# EAGLE board breakout1_ready_for_layout (EAGLE 6.6.0), part 1 of 2
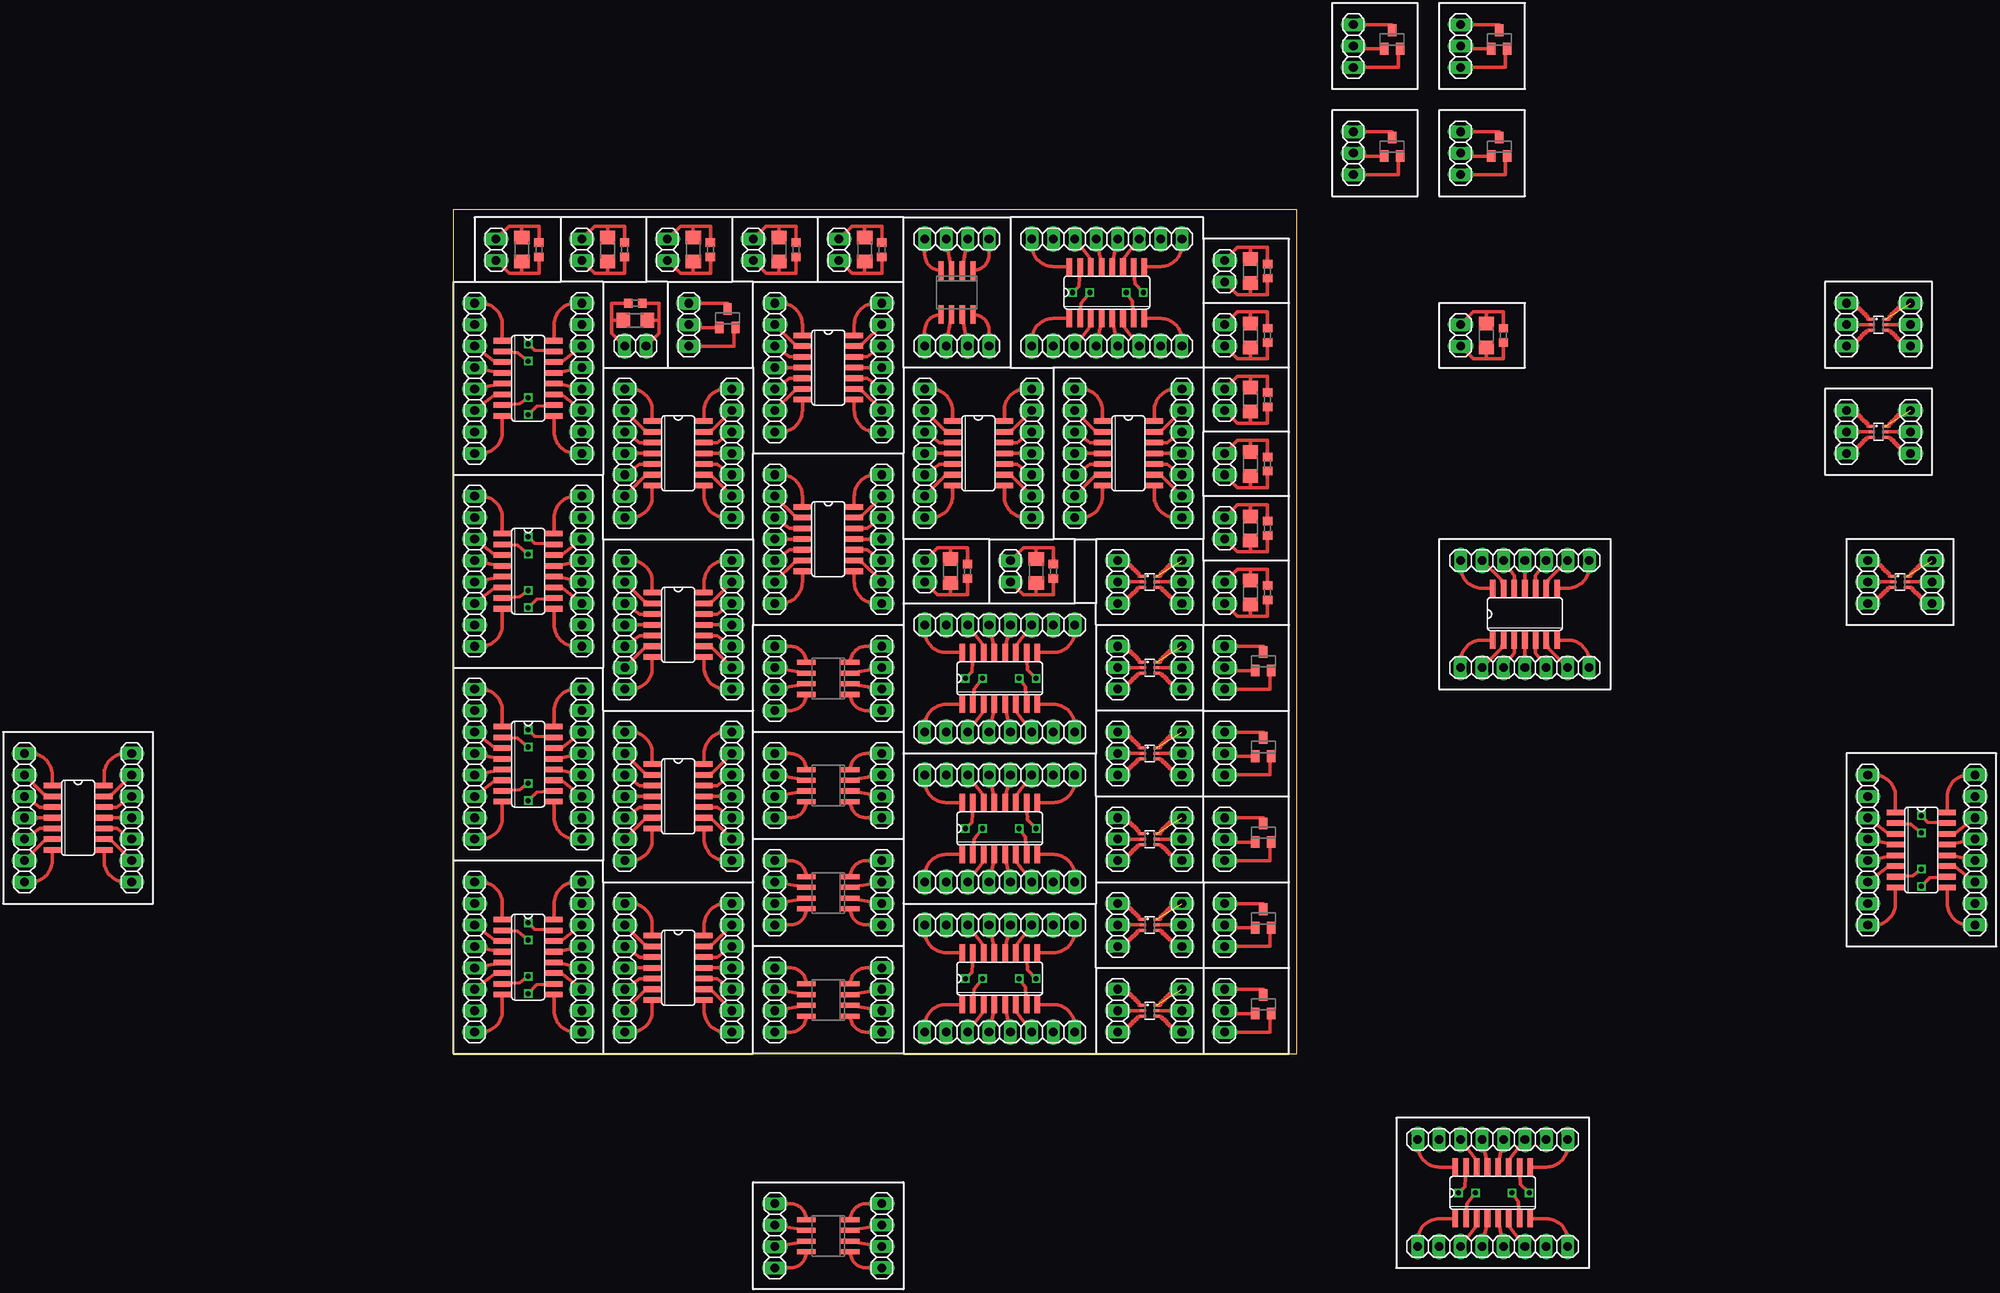
[diagram p0: board, top side]
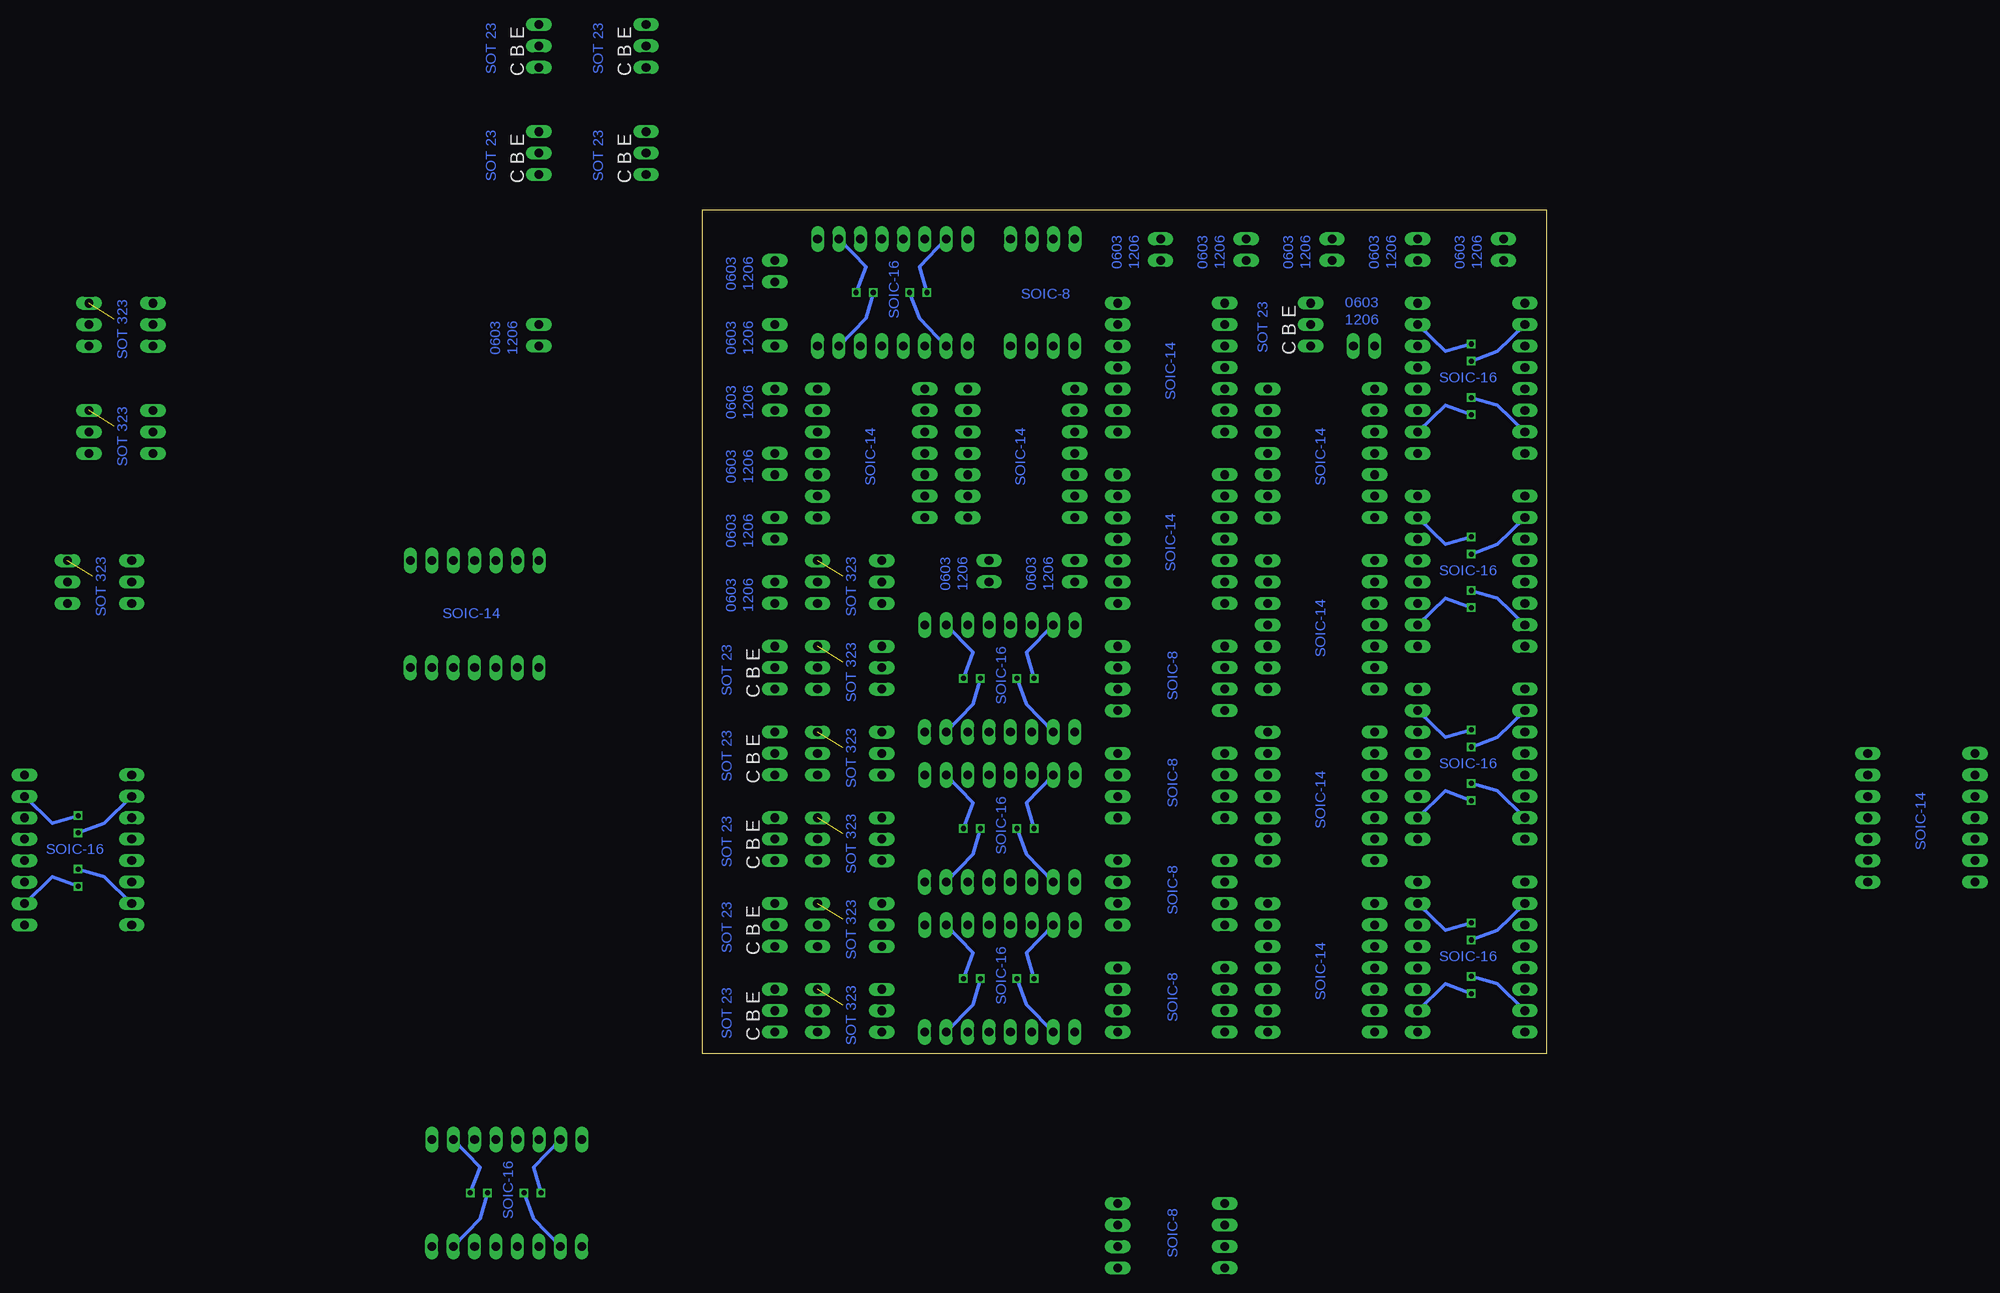
[diagram p1: board, bottom side, seen from below]

Size 100 x 100 mm. Coordinates in mm from the lower left corner, seen from the top.
Outline: 0,0 100,0 100,100 0,100 0,0
Copper layers (1*16): Top 0.035mm / dielectric 1.5mm / Bottom 0.035mm
Design rules "default": minimum track width 10mil, minimum drill 24mil, track to track 8mil, track to pad 8mil, pad to pad 8mil, via to via 8mil, smd to smd 8mil, copper to edge 40mil, drill to drill 8mil, minimum pad ring 10mil, minimum via ring 8mil, stop-mask expansion 4mil, vias tented up to drill 0mil, thermal gap 10mil

## Footprints (pad centres in the part's own frame; a part is rotated, then mirrored left to right if it is on the bottom)
SO16 = smd 0.66 x 2.032: 1 -4.445,-3.073; 2 -3.175,-3.073; 3 -1.905,-3.073; 4 -0.635,-3.073; 5 0.635,-3.073; 6 1.905,-3.073; 7 3.175,-3.073; 8 4.445,-3.073; 9 4.445,3.073; 10 3.175,3.073; 11 1.905,3.073; 12 0.635,3.073; 13 -0.635,3.073; 14 -1.905,3.073; 15 -3.175,3.073; 16 -4.445,3.073
SO14 = smd 0.66 x 2.032: 1 -3.81,-3.073; 2 -2.54,-3.073; 3 -1.27,-3.073; 4 0,-3.073; 5 1.27,-3.073; 6 2.54,-3.073; 7 3.81,-3.073; 8 3.81,3.073; 9 2.54,3.073; 10 1.27,3.073; 11 0,3.073; 12 -1.27,3.073; 13 -2.54,3.073; 14 -3.81,3.073
SO08 = smd 0.6 x 2.2: 1 -1.905,-2.6; 2 -0.635,-2.6; 3 0.635,-2.6; 4 1.905,-2.6; 5 1.905,2.6; 6 0.635,2.6; 7 -0.635,2.6; 8 -1.905,2.6
1X03 = drill 1.016 long: 1 -2.54,0; 2 0,0; 3 2.54,0
1X02 = drill 1.016 long: 1 -1.27,0; 2 1.27,0
1X08 = drill 1.016 long: 1 -8.89,0; 2 -6.35,0; 3 -3.81,0; 4 -1.27,0; 5 1.27,0; 6 3.81,0; 7 6.35,0; 8 8.89,0
1X07 = drill 1.016 long: 1 -7.62,0; 2 -5.08,0; 3 -2.54,0; 4 0,0; 5 2.54,0; 6 5.08,0; 7 7.62,0
1X04 = drill 1.016 long: 1 -3.81,0; 2 -1.27,0; 3 1.27,0; 4 3.81,0
SOT23 = smd 1 x 1.4: 1 -0.95,-1.1; 2 0.95,-1.1; 3 0,1.1
R0603 = smd 1 x 1.1: 1 -0.85,0; 2 0.85,0
R1206 = smd 1.6 x 1.803: 1 -1.422,0; 2 1.422,0
SOT363 = smd 0.3 x 0.7: 1 -0.65,-0.8; 2 0,-0.8; 3 0.65,-0.8; 4 0.65,0.8; 5 0,0.8; 6 -0.65,0.8

## Placement (x,y rotation side)
IC1  74LS151D  [SO16]  8.89,34.29 270 top
IC2  74LS03D  [SO14]  127,52.07 0 top  (outside the outline)
IC3  NE555D  [SO08]  44.45,6.35 90 top
IC4  74LS151D  [SO16]  8.89,11.43 270 top
IC5  74LS151D  [SO16]  8.89,57.15 270 top
IC6  74LS151D  [SO16]  173.99,24.13 270 top  (outside the outline)
IC7  74LS03D  [SO14]  26.67,10.16 270 top
IC8  74LS03D  [SO14]  26.67,30.48 270 top
IC9  74LS03D  [SO14]  -44.45,27.94 270 top  (outside the outline)
IC10  NE555D  [SO08]  44.45,19.05 90 top
IC11  NE555D  [SO08]  44.45,-21.59 90 top  (outside the outline)
IC12  74LS151D  [SO16]  123.19,-16.51 0 top  (outside the outline)
IC13  74LS151D  [SO16]  8.89,80.01 270 top
IC14  74LS03D  [SO14]  26.67,50.8 270 top
IC15  74LS03D  [SO14]  26.67,71.12 270 top
IC16  74LS03D  [SO14]  44.45,81.28 270 top
IC17  NE555D  [SO08]  44.45,31.75 90 top
IC18  NE555D  [SO08]  44.45,44.45 90 top
IC19  74LS03D  [SO14]  44.45,60.96 270 top
IC21  74LS151D  [SO16]  64.77,8.89 0 top
IC22  74LS151D  [SO16]  64.77,26.67 0 top
IC23  74LS151D  [SO16]  64.77,44.45 0 top
IC24  74LS03D  [SO14]  62.23,71.12 270 top
IC25  74LS03D  [SO14]  80.01,71.12 270 top
IC26  74LS151D  [SO16]  77.47,90.17 0 top
IC27  NE555D  [SO08]  59.69,90.17 180 top
JP1  [1X03]  78.74,5.08 90 top
JP2  [1X03]  86.36,5.08 90 top
JP3  [1X03]  106.68,106.68 270 top  (outside the outline)
JP4  [1X02]  119.38,85.09 270 top  (outside the outline)
JP5  [1X08]  15.24,34.29 90 top
JP6  [1X08]  2.54,34.29 270 top
JP7  [1X07]  127,45.72 0 top  (outside the outline)
JP8  [1X07]  127,58.42 180 top  (outside the outline)
JP9  [1X04]  50.8,6.35 90 top
JP10  [1X04]  38.1,6.35 270 top
JP11  [1X08]  15.24,11.43 90 top
JP12  [1X08]  2.54,11.43 270 top
JP13  [1X08]  15.24,57.15 90 top
JP14  [1X08]  2.54,57.15 270 top
JP15  [1X08]  180.34,24.13 90 top  (outside the outline)
JP16  [1X08]  167.64,24.13 270 top  (outside the outline)
JP17  [1X07]  20.32,10.16 270 top
JP18  [1X07]  33.02,10.16 90 top
JP19  [1X07]  20.32,30.48 270 top
JP20  [1X07]  33.02,30.48 90 top
JP21  [1X07]  -50.8,27.94 270 top  (outside the outline)
JP22  [1X07]  -38.1,27.94 90 top  (outside the outline)
JP23  [1X02]  91.44,92.71 270 top
JP24  [1X02]  91.44,85.09 270 top
JP25  [1X02]  5.08,95.25 270 top
JP26  [1X03]  106.68,119.38 270 top  (outside the outline)
JP27  [1X03]  119.38,106.68 270 top  (outside the outline)
JP28  [1X03]  119.38,119.38 270 top  (outside the outline)
JP29  [1X03]  165.1,73.66 90 top  (outside the outline)
JP30  [1X03]  172.72,73.66 90 top  (outside the outline)
JP31  [1X03]  78.74,15.24 90 top
JP32  [1X03]  86.36,15.24 90 top
JP33  [1X03]  165.1,86.36 90 top  (outside the outline)
JP34  [1X03]  172.72,86.36 90 top  (outside the outline)
JP35  [1X04]  50.8,19.05 90 top
JP36  [1X04]  38.1,19.05 270 top
JP37  [1X04]  50.8,-21.59 90 top  (outside the outline)
JP38  [1X04]  38.1,-21.59 270 top  (outside the outline)
JP39  [1X08]  123.19,-10.16 180 top  (outside the outline)
JP40  [1X08]  123.19,-22.86 0 top  (outside the outline)
JP41  [1X08]  15.24,80.01 90 top
JP42  [1X08]  2.54,80.01 270 top
JP43  [1X07]  20.32,50.8 270 top
JP44  [1X07]  33.02,50.8 90 top
JP45  [1X07]  20.32,71.12 270 top
JP46  [1X07]  33.02,71.12 90 top
JP47  [1X07]  38.1,81.28 270 top
JP48  [1X07]  50.8,81.28 90 top
JP49  [1X03]  91.44,5.08 270 top
JP50  [1X03]  91.44,15.24 270 top
JP51  [1X03]  91.44,25.4 270 top
JP52  [1X03]  91.44,35.56 270 top
JP53  [1X03]  91.44,45.72 270 top
JP54  [1X02]  91.44,62.23 270 top
JP55  [1X02]  91.44,77.47 270 top
JP56  [1X02]  91.44,69.85 270 top
JP57  [1X04]  50.8,31.75 90 top
JP58  [1X04]  38.1,31.75 270 top
JP59  [1X04]  50.8,44.45 90 top
JP60  [1X04]  38.1,44.45 270 top
JP61  [1X07]  38.1,60.96 270 top
JP62  [1X07]  50.8,60.96 90 top
JP63  [1X02]  21.59,83.82 0 top
JP64  [1X03]  167.64,55.88 90 top  (outside the outline)
JP65  [1X02]  91.44,54.61 270 top
JP66  [1X03]  78.74,45.72 90 top
JP67  [1X03]  86.36,45.72 90 top
JP68  [1X03]  78.74,55.88 90 top
JP69  [1X03]  86.36,55.88 90 top
JP70  [1X03]  78.74,25.4 90 top
JP71  [1X03]  86.36,25.4 90 top
JP72  [1X03]  78.74,35.56 90 top
JP73  [1X03]  86.36,35.56 90 top
JP74  [1X08]  64.77,15.24 180 top
JP75  [1X08]  64.77,2.54 0 top
JP76  [1X08]  64.77,33.02 180 top
JP77  [1X08]  64.77,20.32 0 top
JP78  [1X08]  64.77,50.8 180 top
JP79  [1X08]  64.77,38.1 0 top
JP80  [1X02]  55.88,57.15 270 top
JP81  [1X02]  66.04,57.15 270 top
JP82  [1X07]  55.88,71.12 270 top
JP83  [1X07]  68.58,71.12 90 top
JP84  [1X07]  73.66,71.12 270 top
JP85  [1X07]  86.36,71.12 90 top
JP86  [1X08]  77.47,96.52 180 top
JP87  [1X08]  77.47,83.82 0 top
JP88  [1X04]  59.69,96.52 180 top
JP89  [1X04]  59.69,83.82 0 top
JP90  [1X03]  175.26,55.88 90 top  (outside the outline)
JP91  [1X03]  27.94,86.36 270 top
JP92  [1X02]  15.24,95.25 270 top
JP93  [1X02]  25.4,95.25 270 top
JP94  [1X02]  35.56,95.25 270 top
JP95  [1X02]  45.72,95.25 270 top
Q1  BCX70SMD  [SOT23]  111.25,107.44 0 top  (outside the outline)
Q2  BCX70SMD  [SOT23]  111.25,120.14 0 top  (outside the outline)
Q3  BCX70SMD  [SOT23]  123.95,107.44 0 top  (outside the outline)
Q4  BCX70SMD  [SOT23]  123.95,120.14 0 top  (outside the outline)
Q5  BCX70SMD  [SOT23]  96.01,5.84 0 top
Q6  BCX70SMD  [SOT23]  96.01,16 0 top
Q7  BCX70SMD  [SOT23]  96.01,26.16 0 top
Q8  BCX70SMD  [SOT23]  96.01,36.32 0 top
Q9  BCX70SMD  [SOT23]  96.01,46.48 0 top
Q10  BCX70SMD  [SOT23]  32.51,87.12 0 top
R1  [R0603]  96.52,92.71 90 top
R2  [R0603]  124.46,85.09 90 top  (outside the outline)
R3  [R1206]  94.49,92.71 90 top
R4  [R1206]  122.43,85.09 90 top  (outside the outline)
R5  [R0603]  96.52,85.09 90 top
R6  [R1206]  94.49,85.09 90 top
R7  [R0603]  10.16,95.25 90 top
R8  [R1206]  8.13,95.25 90 top
R9  [R0603]  96.52,77.47 90 top
R10  [R1206]  94.49,77.47 90 top
R11  [R0603]  96.52,69.85 90 top
R12  [R1206]  94.49,69.85 90 top
R13  [R0603]  96.52,62.23 90 top
R14  [R1206]  94.49,62.23 90 top
R15  [R0603]  96.52,54.61 90 top
R16  [R1206]  94.49,54.61 90 top
R17  [R0603]  60.96,57.15 90 top
R18  [R1206]  58.93,57.15 90 top
R19  [R0603]  71.12,57.15 90 top
R20  [R1206]  69.09,57.15 90 top
R21  [R0603]  21.59,88.9 180 top
R22  [R1206]  21.59,86.87 180 top
R23  [R0603]  20.32,95.25 90 top
R24  [R1206]  18.29,95.25 90 top
R25  [R0603]  30.48,95.25 90 top
R26  [R1206]  28.45,95.25 90 top
R27  [R0603]  40.64,95.25 90 top
R28  [R1206]  38.61,95.25 90 top
R29  [R0603]  50.8,95.25 90 top
R30  [R1206]  48.77,95.25 90 top
U$1  DMMT3904W  [SOT363]  82.55,5.08 270 top
U$2  DMMT3904W  [SOT363]  168.91,73.66 270 top  (outside the outline)
U$3  DMMT3904W  [SOT363]  82.55,15.24 270 top
U$4  DMMT3904W  [SOT363]  168.91,86.36 270 top  (outside the outline)
U$5  DMMT3904W  [SOT363]  82.55,45.72 270 top
U$6  DMMT3904W  [SOT363]  82.55,55.88 270 top
U$7  DMMT3904W  [SOT363]  82.55,25.4 270 top
U$8  DMMT3904W  [SOT363]  82.55,35.56 270 top
U$9  DMMT3904W  [SOT363]  171.45,55.88 270 top  (outside the outline)

## Library data of the parts
IC1 IC2 IC4-IC9 IC12-IC16 IC19 IC21-IC26 = 74xx-us
IC3 IC10 IC11 IC17 IC18 IC27 = linear
JP1-JP95 = pinhead
Q1-Q10 = transistor-npn
R1-R30 = rcl
U$1-U$9 = !synth_sch

## Nets
N$1: JP1.3 U$1.1
N$2: JP1.2 U$1.2
N$3: JP1.1 U$1.3
N$4: JP2.1 U$1.4
N$5: JP2.2 U$1.5
N$6: JP2.3 U$1.6
N$8: JP3.2 Q1.1
N$9: IC4.1 JP12.1
N$10: JP3.3 Q1.2
N$11: JP4.1 R2.2 R4.2
N$12: JP4.2 R2.1 R4.1
N$13: IC1.1 JP6.1
N$14: IC1.2 JP6.2
N$15: IC1.3 JP6.3
N$16: IC1.4 JP6.4
N$17: IC1.7 JP6.7
N$18: IC1.5 JP6.5
N$19: IC1.6 JP6.6
N$20: IC1.8 JP6.8
N$21: IC1.9 JP5.1
N$22: IC1.10 JP5.2
N$23: IC1.11 JP5.3
N$24: IC1.12 JP5.4
N$25: IC1.13 JP5.5
N$26: IC1.14 JP5.6
N$27: IC1.15 JP5.7
N$28: IC1.16 JP5.8
N$29: IC2.1 JP7.1
N$31: IC2.2 JP7.2
N$32: IC2.4 JP7.4
N$33: IC2.5 JP7.5
N$34: IC2.6 JP7.6
N$35: IC2.3 JP7.3
N$36: IC2.8 JP8.1
N$37: IC2.9 JP8.2
N$38: IC2.10 JP8.3
N$39: IC2.11 JP8.4
N$40: IC2.12 JP8.5
N$41: IC2.13 JP8.6
N$42: IC2.14 JP8.7
N$43: IC2.7 JP7.7
N$44: IC3.1 JP9.1
N$45: IC3.2 JP9.2
N$46: IC3.4 JP9.4
N$47: IC3.3 JP9.3
N$48: IC3.5 JP10.1
N$49: IC3.6 JP10.2
N$50: IC3.7 JP10.3
N$51: IC3.8 JP10.4
N$52: IC4.2 JP12.2
N$53: JP3.1 Q1.3
N$54: IC4.3 JP12.3
N$55: IC4.4 JP12.4
N$56: IC4.7 JP12.7
N$57: IC4.5 JP12.5
N$58: IC4.6 JP12.6
N$59: IC4.8 JP12.8
N$60: IC4.9 JP11.1
N$61: IC4.10 JP11.2
N$62: IC4.11 JP11.3
N$63: IC4.12 JP11.4
N$64: IC4.13 JP11.5
N$65: IC4.14 JP11.6
N$66: IC4.16 JP11.8
N$67: IC4.15 JP11.7
N$68: IC5.1 JP14.1
N$69: IC5.2 JP14.2
N$70: IC5.3 JP14.3
N$71: IC5.4 JP14.4
N$72: IC5.7 JP14.7
N$73: IC5.5 JP14.5
N$74: IC5.6 JP14.6
N$75: IC5.8 JP14.8
N$76: IC5.9 JP13.1
N$77: IC5.10 JP13.2
N$78: IC5.11 JP13.3
N$79: IC5.12 JP13.4
N$80: IC5.13 JP13.5
N$81: IC5.14 JP13.6
N$82: IC5.16 JP13.8
N$83: IC5.15 JP13.7
N$84: IC6.1 JP16.1
N$85: IC6.2 JP16.2
N$86: IC6.3 JP16.3
N$87: IC6.4 JP16.4
N$88: IC6.7 JP16.7
N$89: IC6.5 JP16.5
N$90: IC6.6 JP16.6
N$91: IC6.8 JP16.8
N$92: IC6.9 JP15.1
N$93: IC6.10 JP15.2
N$94: IC6.11 JP15.3
N$95: IC6.12 JP15.4
N$96: IC6.13 JP15.5
N$97: IC6.14 JP15.6
N$98: IC6.16 JP15.8
N$99: IC6.15 JP15.7
N$100: IC7.1 JP17.1
N$101: IC7.2 JP17.2
N$102: IC7.4 JP17.4
N$103: IC7.5 JP17.5
N$104: IC7.6 JP17.6
N$105: IC7.3 JP17.3
N$106: IC7.8 JP18.1
N$107: IC7.9 JP18.2
N$108: IC7.10 JP18.3
N$109: IC7.11 JP18.4
N$110: IC7.12 JP18.5
N$111: IC7.13 JP18.6
N$112: IC7.14 JP18.7
N$113: IC7.7 JP17.7
N$114: IC8.1 JP19.1
N$115: IC8.2 JP19.2
N$116: IC8.4 JP19.4
N$117: IC8.5 JP19.5
N$118: IC8.6 JP19.6
N$119: IC8.3 JP19.3
N$120: IC8.8 JP20.1
N$121: IC8.9 JP20.2
N$122: IC8.10 JP20.3
N$123: IC8.11 JP20.4
N$124: IC8.12 JP20.5
N$125: IC8.13 JP20.6
N$126: IC8.14 JP20.7
N$127: IC8.7 JP19.7
N$128: IC9.1 JP21.1
N$129: IC9.2 JP21.2
N$130: IC9.4 JP21.4
N$131: IC9.5 JP21.5
N$132: IC9.6 JP21.6
N$133: IC9.3 JP21.3
N$134: IC9.8 JP22.1
N$135: IC9.9 JP22.2
N$136: IC9.10 JP22.3
N$137: IC9.11 JP22.4
N$138: IC9.12 JP22.5
N$139: IC9.13 JP22.6
N$140: IC9.14 JP22.7
N$141: IC9.7 JP21.7
N$142: JP23.1 R1.2 R3.2
N$143: JP23.2 R1.1 R3.1
N$144: JP24.1 R5.2 R6.2
N$145: JP24.2 R5.1 R6.1
N$146: JP25.1 R7.2 R8.2
N$147: JP25.2 R7.1 R8.1
N$148: JP26.2 Q2.1
N$149: JP26.3 Q2.2
N$150: JP26.1 Q2.3
N$151: JP27.2 Q3.1
N$152: JP27.3 Q3.2
N$153: JP27.1 Q3.3
N$154: JP28.2 Q4.1
N$155: JP28.3 Q4.2
N$156: JP28.1 Q4.3
N$157: JP29.1 U$2.3
N$158: JP29.2 U$2.2
N$159: JP29.3 U$2.1
N$160: JP30.1 U$2.4
N$161: JP30.2 U$2.5
N$162: JP30.3 U$2.6
N$164: JP31.1 U$3.3
N$165: JP31.2 U$3.2
N$166: JP31.3 U$3.1
N$167: JP32.1 U$3.4
N$168: JP32.2 U$3.5
N$169: JP32.3 U$3.6
N$171: JP33.1 U$4.3
N$172: JP33.2 U$4.2
N$173: JP33.3 U$4.1
N$174: JP34.1 U$4.4
N$175: JP34.2 U$4.5
N$176: JP34.3 U$4.6
N$178: IC10.1 JP35.1
N$179: IC10.2 JP35.2
N$180: IC10.4 JP35.4
N$181: IC10.3 JP35.3
N$182: IC10.5 JP36.1
N$183: IC10.6 JP36.2
N$184: IC10.7 JP36.3
N$185: IC10.8 JP36.4
N$186: IC11.1 JP37.1
N$187: IC11.2 JP37.2
N$188: IC11.4 JP37.4
N$189: IC11.3 JP37.3
N$190: IC11.5 JP38.1
N$191: IC11.6 JP38.2
N$192: IC11.7 JP38.3
N$193: IC11.8 JP38.4
N$194: IC12.1 JP40.1
N$195: IC12.2 JP40.2
N$196: IC12.3 JP40.3
N$197: IC12.4 JP40.4
N$198: IC12.7 JP40.7
N$199: IC12.5 JP40.5
N$200: IC12.6 JP40.6
N$201: IC12.8 JP40.8
N$202: IC13.1 JP42.1
N$203: IC13.2 JP42.2
N$204: IC13.3 JP42.3
N$205: IC13.4 JP42.4
N$206: IC13.7 JP42.7
N$207: IC13.5 JP42.5
N$208: IC13.6 JP42.6
N$209: IC13.8 JP42.8
N$210: IC13.9 JP41.1
N$211: IC13.10 JP41.2
N$212: IC13.11 JP41.3
N$213: IC13.12 JP41.4
N$214: IC13.13 JP41.5
N$215: IC13.14 JP41.6
N$216: IC13.16 JP41.8
N$217: IC13.15 JP41.7
N$218: IC14.1 JP43.1
N$219: IC14.2 JP43.2
N$220: IC14.4 JP43.4
N$221: IC14.5 JP43.5
N$222: IC14.6 JP43.6
N$223: IC14.3 JP43.3
N$224: IC14.8 JP44.1
N$225: IC14.9 JP44.2
N$226: IC14.10 JP44.3
N$227: IC14.11 JP44.4
N$228: IC14.12 JP44.5
N$229: IC14.13 JP44.6
N$230: IC14.14 JP44.7
N$231: IC14.7 JP43.7
N$232: IC15.1 JP45.1
N$233: IC15.2 JP45.2
N$234: IC15.4 JP45.4
N$235: IC15.5 JP45.5
N$236: IC15.6 JP45.6
N$237: IC15.3 JP45.3
N$238: IC15.8 JP46.1
N$239: IC15.9 JP46.2
N$240: IC15.10 JP46.3
N$241: IC15.11 JP46.4
N$242: IC15.12 JP46.5
N$243: IC15.13 JP46.6
N$244: IC15.14 JP46.7
N$245: IC15.7 JP45.7
N$246: IC16.1 JP47.1
N$247: IC16.2 JP47.2
N$248: IC16.4 JP47.4
N$249: IC16.5 JP47.5
N$250: IC16.6 JP47.6
N$251: IC16.3 JP47.3
N$252: IC16.8 JP48.1
N$253: IC16.9 JP48.2
N$254: JP49.2 Q5.1
N$255: JP49.3 Q5.2
N$256: JP49.1 Q5.3
N$257: JP50.2 Q6.1
N$258: JP50.3 Q6.2
N$259: JP50.1 Q6.3
N$260: JP51.2 Q7.1
N$261: JP51.3 Q7.2
N$262: JP51.1 Q7.3
N$263: JP52.2 Q8.1
N$264: JP52.3 Q8.2
N$265: JP52.1 Q8.3
N$266: JP53.2 Q9.1
N$267: JP53.3 Q9.2
N$268: JP53.1 Q9.3
N$269: JP54.1 R13.2 R14.2
N$270: JP54.2 R13.1 R14.1
N$271: JP65.1 R15.2 R16.2
N$272: JP55.1 R9.2 R10.2
N$273: JP55.2 R9.1 R10.1
N$274: JP56.1 R11.2 R12.2
N$275: JP56.2 R11.1 R12.1
N$276: JP65.2 R15.1 R16.1
N$277: JP66.1 U$5.3
N$278: IC17.1 JP57.1
N$279: IC17.2 JP57.2
N$280: IC17.4 JP57.4
N$281: IC17.3 JP57.3
N$282: IC17.5 JP58.1
N$283: IC17.6 JP58.2
N$284: IC17.7 JP58.3
N$285: IC17.8 JP58.4
N$286: IC18.1 JP59.1
N$287: IC18.2 JP59.2
N$288: IC18.4 JP59.4
N$289: IC18.3 JP59.3
N$290: IC18.5 JP60.1
N$291: IC18.6 JP60.2
N$292: IC18.7 JP60.3
N$293: IC18.8 JP60.4
N$294: IC19.1 JP61.1
N$295: IC19.2 JP61.2
N$296: IC19.4 JP61.4
N$297: IC19.5 JP61.5
N$298: IC19.6 JP61.6
N$299: IC19.3 JP61.3
N$300: IC19.8 JP62.1
N$301: IC19.9 JP62.2
N$302: IC19.10 JP62.3
N$303: IC19.11 JP62.4
N$304: IC19.12 JP62.5
N$305: IC19.13 JP62.6
N$306: IC19.14 JP62.7
N$307: IC19.7 JP61.7
N$308: IC16.10 JP48.3
N$309: IC16.11 JP48.4
N$310: IC16.12 JP48.5
N$311: IC16.13 JP48.6
N$312: IC16.14 JP48.7
N$313: IC16.7 JP47.7
N$314: JP63.1 R21.2 R22.2
N$315: JP63.2 R21.1 R22.1
N$316: JP64.1 U$9.3
N$317: JP64.2 U$9.2
N$318: JP64.3 U$9.1
N$319: JP90.1 U$9.4
N$320: JP90.2 U$9.5
N$321: JP90.3 U$9.6
N$323: JP91.2 Q10.1
N$324: JP66.2 U$5.2
N$325: JP66.3 U$5.1
N$326: JP67.1 U$5.4
N$327: JP67.2 U$5.5
N$328: JP67.3 U$5.6
N$330: JP68.1 U$6.3
N$331: JP68.2 U$6.2
N$332: JP68.3 U$6.1
N$333: JP69.1 U$6.4
N$334: JP69.2 U$6.5
N$335: JP69.3 U$6.6
N$337: JP70.1 U$7.3
N$338: JP70.2 U$7.2
N$339: JP70.3 U$7.1
N$340: JP71.1 U$7.4
N$341: JP71.2 U$7.5
N$342: JP71.3 U$7.6
N$344: JP72.1 U$8.3
N$345: JP72.2 U$8.2
N$346: JP72.3 U$8.1
N$347: JP73.1 U$8.4
N$348: JP73.2 U$8.5
N$349: JP73.3 U$8.6
N$351: IC12.9 JP39.1
N$352: IC12.10 JP39.2
N$353: IC12.11 JP39.3
N$354: IC12.12 JP39.4
N$355: IC12.13 JP39.5
N$356: IC12.14 JP39.6
N$357: IC12.16 JP39.8
N$358: IC12.15 JP39.7
N$359: IC21.1 JP75.1
N$360: IC21.2 JP75.2
N$361: IC21.3 JP75.3
N$362: IC21.4 JP75.4
N$363: IC21.7 JP75.7
N$364: IC21.5 JP75.5
N$365: IC21.6 JP75.6
N$366: IC21.8 JP75.8
N$367: IC21.9 JP74.1
N$368: IC21.10 JP74.2
N$369: IC21.11 JP74.3
N$370: IC21.12 JP74.4
N$371: IC21.13 JP74.5
N$372: IC21.14 JP74.6
N$373: IC21.16 JP74.8
N$374: IC21.15 JP74.7
N$375: IC22.1 JP77.1
N$376: IC22.2 JP77.2
N$377: IC22.3 JP77.3
N$378: IC22.4 JP77.4
N$379: IC22.7 JP77.7
N$380: IC22.5 JP77.5
N$381: IC22.6 JP77.6
N$382: IC22.8 JP77.8
N$383: IC22.9 JP76.1
N$384: IC22.10 JP76.2
N$385: IC22.11 JP76.3
N$386: IC22.12 JP76.4
N$387: IC22.13 JP76.5
N$388: IC22.14 JP76.6
N$389: IC22.16 JP76.8
N$390: IC22.15 JP76.7
N$391: IC23.1 JP79.1
N$392: IC23.2 JP79.2
N$393: IC23.3 JP79.3
N$394: IC23.4 JP79.4
N$395: IC23.7 JP79.7
N$396: IC23.5 JP79.5
N$397: IC23.6 JP79.6
N$398: IC23.8 JP79.8
N$399: IC23.9 JP78.1
N$400: IC23.10 JP78.2
N$401: IC23.11 JP78.3
N$402: IC23.12 JP78.4
N$403: IC23.13 JP78.5
N$404: IC23.14 JP78.6
N$405: IC23.16 JP78.8
N$406: IC23.15 JP78.7
N$407: JP80.1 R17.2 R18.2
N$408: JP80.2 R17.1 R18.1
N$409: JP81.1 R19.2 R20.2
N$410: JP81.2 R19.1 R20.1
N$411: IC24.1 JP82.1
N$412: IC24.2 JP82.2
N$413: IC24.4 JP82.4
N$414: IC24.5 JP82.5
N$415: IC24.6 JP82.6
N$416: IC24.3 JP82.3
N$417: IC24.8 JP83.1
N$418: IC24.9 JP83.2
N$419: IC24.10 JP83.3
N$420: IC24.11 JP83.4
N$421: IC24.12 JP83.5
N$422: IC24.13 JP83.6
N$423: IC24.14 JP83.7
N$424: IC24.7 JP82.7
N$425: IC25.1 JP84.1
N$426: IC25.2 JP84.2
N$427: IC25.4 JP84.4
N$428: IC25.5 JP84.5
N$429: IC25.6 JP84.6
N$430: IC25.3 JP84.3
N$431: IC25.8 JP85.1
N$432: IC25.9 JP85.2
N$433: IC25.10 JP85.3
N$434: IC25.11 JP85.4
N$435: IC25.12 JP85.5
N$436: IC25.13 JP85.6
N$437: IC25.14 JP85.7
N$438: IC25.7 JP84.7
N$439: IC26.1 JP87.1
N$440: IC26.2 JP87.2
N$441: IC26.3 JP87.3
N$442: IC26.4 JP87.4
N$443: IC26.7 JP87.7
N$444: IC26.5 JP87.5
N$445: IC26.6 JP87.6
N$446: IC26.8 JP87.8
N$447: IC26.9 JP86.1
N$448: IC26.10 JP86.2
N$449: IC26.11 JP86.3
N$450: IC26.12 JP86.4
N$451: IC26.13 JP86.5
N$452: IC26.14 JP86.6
N$453: IC26.16 JP86.8
N$454: IC26.15 JP86.7
N$455: IC27.1 JP88.1
N$456: IC27.2 JP88.2
N$457: IC27.4 JP88.4
N$458: IC27.3 JP88.3
N$459: IC27.5 JP89.1
N$460: IC27.6 JP89.2
N$461: IC27.7 JP89.3
N$462: IC27.8 JP89.4
N$463: JP91.3 Q10.2
N$464: JP91.1 Q10.3
N$465: JP92.1 R23.2 R24.2
N$466: JP92.2 R23.1 R24.1
N$467: JP93.1 R25.2 R26.2
N$468: JP93.2 R25.1 R26.1
N$469: JP94.1 R27.2 R28.2
N$470: JP94.2 R27.1 R28.1
N$471: JP95.1 R29.2 R30.2
N$472: JP95.2 R29.1 R30.1